# EAGLE board CE6A (EAGLE 6.5.0)
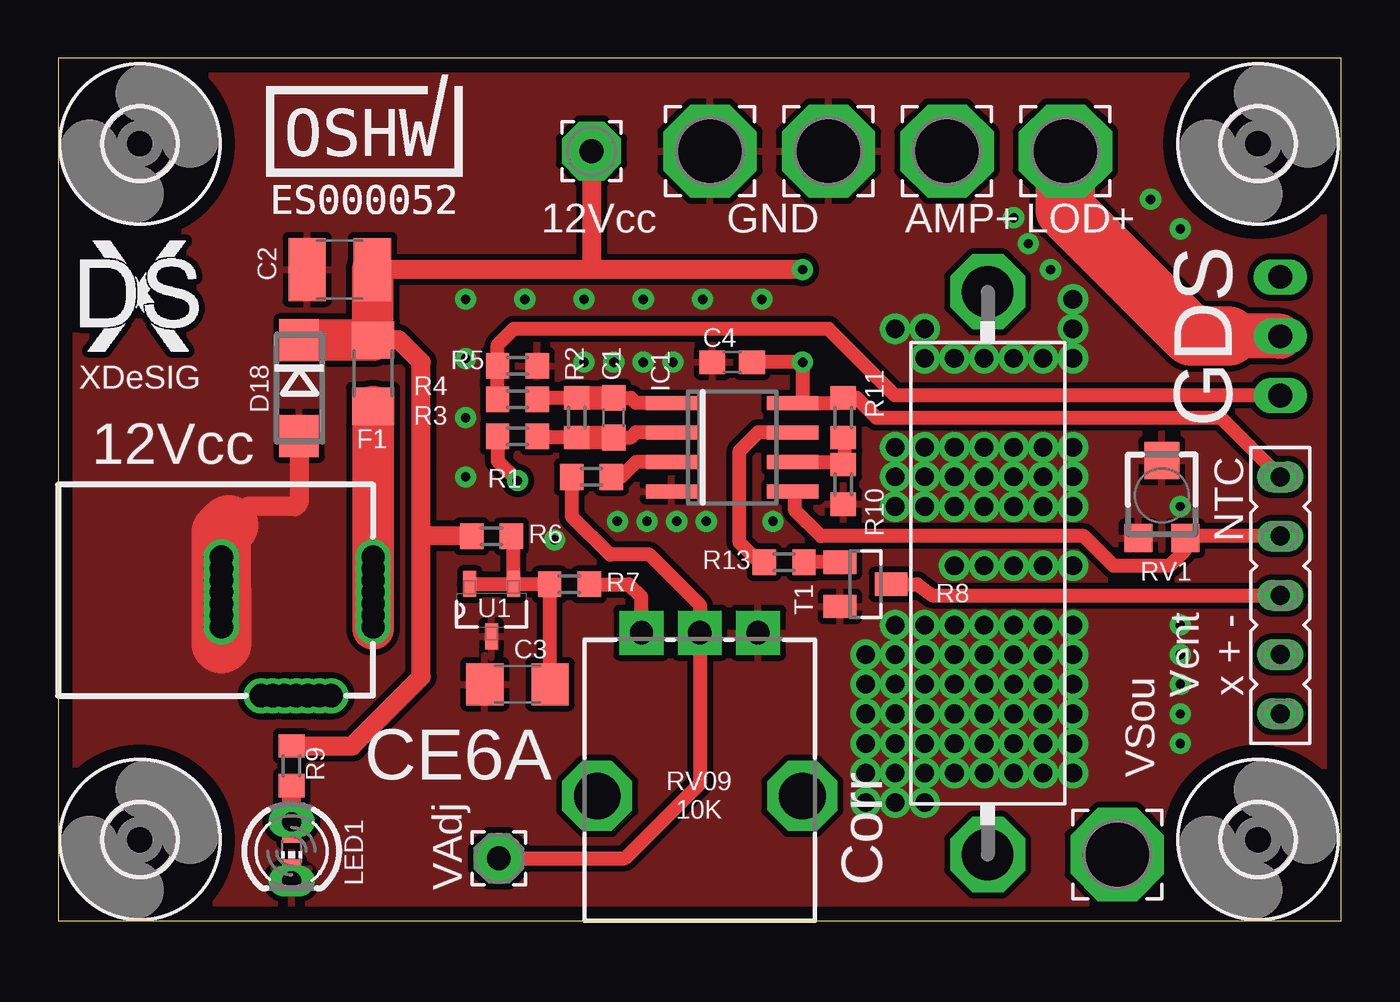
[diagram p0: board, top side]
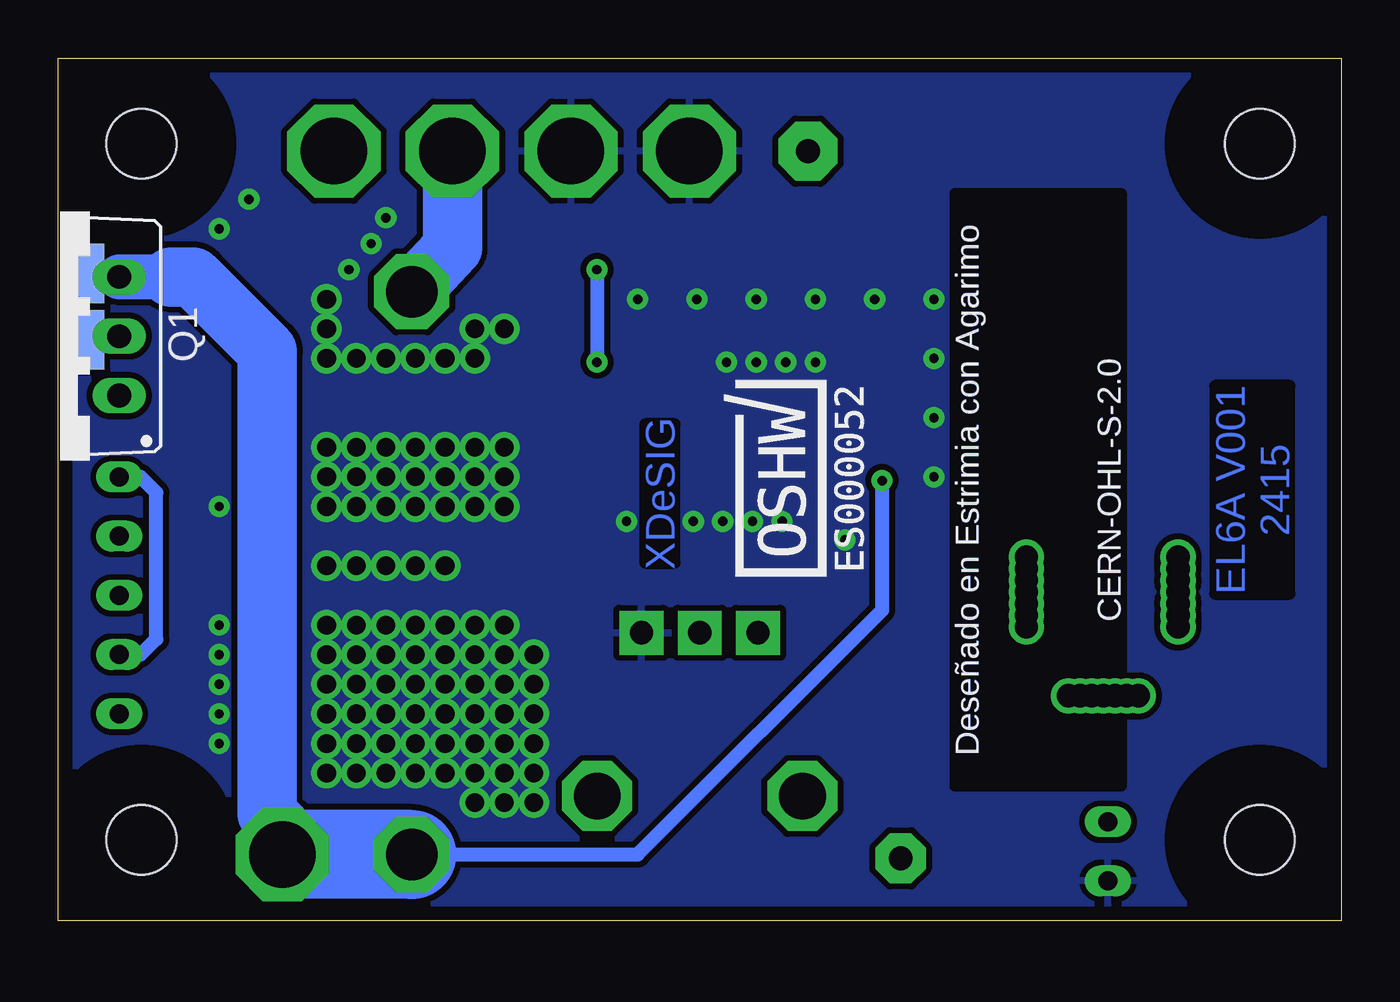
[diagram p1: board, bottom side, seen from below]

Size 55 x 36.98 mm. Coordinates in mm from the lower left corner, seen from the top.
Outline: 0,36.98 0,0 55,0 55,36.98 0,36.98
Copper layers (1*16): Top 0.035mm / dielectric 1.5mm / Bottom 0.035mm
Design rules "Vias_pintadas *": minimum track width 10mil, minimum drill 22mil, track to track 10mil, track to pad 10mil, pad to pad 8mil, via to via 12mil, smd to smd 8mil, copper to edge 24mil, drill to drill 12mil, minimum pad ring 10mil, minimum via ring 10mil, stop-mask expansion 2mil, vias tented up to drill 60mil, thermal gap 10mil
Net classes: 0 default: width 0.254 mm, drill 0.61 mm, clearance 0.254 mm

## Footprints (pad centres in the part's own frame; a part is rotated, then mirrored left to right if it is on the bottom)
C0603 = smd 1.1 x 1: 1 -0.85,0; 2 0.85,0
C1210 = smd 1.6 x 2.7: 1 -1.4,0; 2 1.4,0
C1206 = smd 1.6 x 1.8: 1 -1.4,0; 2 1.4,0
DO214AC = smd 1.8 x 1.7: A 2.05,0; C -2.05,0
R1206 = smd 1.6 x 1.803: 1 -1.422,0; 2 1.422,0
3,0 = hole 3: 0,0
SO08 = smd 0.6 x 2.2: 1 -1.905,-2.6; 2 -0.635,-2.6; 3 0.635,-2.6; 4 1.905,-2.6; 5 1.905,2.6; 6 0.635,2.6; 7 -0.635,2.6; 8 -1.905,2.6
CHIP-LED0603 = smd 0.8 x 0.8: A 0,-0.75; C 0,0.75
LED3MM = drill 0.813 pad 1.016 long: A -1.27,0; K 1.27,0
3,81/1,1 = drill 2.85 pad 4 octagon: 1 0,0
2,54/1,0 = drill 1.016 pad 2.54 octagon: 1 0,0
2,15/1,0 = drill 1.016 pad 2.159 octagon: 1 0,0
SMD1,27-2,54 = smd 1.27 x 2.54: 1 0,0
PWR_JACK_UNI_MILLING = drill 1: + 0,4.75; +1 0,5.25; +2 0,5.75; +3 0,6.25; +4 0,4.25; +5 0,3.75; +6 0,3.25; - -6.5,4.75; -1 -6.5,5.25; -2 -6.5,5.75; -3 -6.5,4.25; -4 -6.5,3.75; -5 -6.5,6.25; -6 -6.5,3.25; -- -3.3,0.3; --1 -3.8,0.3; --2 -4.3,0.3; --3 -4.8,0.3; --4 -2.8,0.3; --5 -2.3,0.3; --6 -1.8,0.3
TO220BV = drill 1.016 long: D 0,-2.54; G -2.54,-2.54; S 2.54,-2.54
R0603 = smd 1 x 1.1: 1 -0.85,0; 2 0.85,0
VTA54 = drill 2.2 octagon: 1 -12.065,0; 2 12.065,0
TC33X = smd 1.2 x 1.2: 1 -1,-1.825; 3 1,-1.825 | smd 1.5 x 1.6: 2 0,1.5
RV09 = drill 1 pad 1.88 square: P$1 7,-2.5; P$2 7,0; P$3 7,2.5 | drill 2 octagon: P$4 0,-4.4; P$5 0,4.4
FE05-1 = drill 0.813 long: 1 -5.08,0; 2 -2.54,0; 3 0,0; 4 2.54,0; 5 5.08,0
SOT23 = smd 1 x 1.4: 1 -0.95,-1.1; 2 0.95,-1.1; 3 0,1.1
SOT95P240X135-3N = smd 1.118 x 0.559: 1 -1.118,0; 2 1.118,-0.94; 3 1.118,0.94

## Placement (x,y rotation side)
C1  10nF  [C0603]  23.81,21.57 90 top
C2  10uF/25V  [C1210]  12.07,27.92 180 top
C3  10uF/16V  [C1206]  19.68,10.14 180 top
C4  100nF  [C0603]  28.89,23.95 0 top
D18  ss14  [DO214AC]  10.32,22.84 270 top
F1  [R1206]  13.49,23.48 90 top
H1  MOUNT-HOLE3.0  [3,0]  3.49,33.32 0 top
H2  MOUNT-HOLE3.0  [3,0]  51.44,33.32 0 top
H3  MOUNT-HOLE3.0  [3,0]  3.49,3.47 0 top
H4  MOUNT-HOLE3.0  [3,0]  51.44,3.47 0 top
IC1  LM358  [SO08]  28.89,20.3 270 top
LED1  0603  [CHIP-LED0603]  10,2.98 180 top
LED1.1  3mm  [LED3MM]  10,2.98 270 top
PAD1  +Load  [3,81/1,1]  43.18,33 0 top
PAD2  +12V  [2,54/1,0]  22.86,33 0 top
PAD3  +AMP  [3,81/1,1]  38.1,33 0 top
PAD4  GND  [3,81/1,1]  33.02,33 270 top
PAD5  VSoU  [3,81/1,1]  45.4,2.84 270 top
PAD6  GND  [3,81/1,1]  27.94,33 0 top
PAD7  V_adj  [2,15/1,0]  18.89,2.68 270 top
PAD8  [SMD1,27-2,54]  53.66,27.76 0 bottom
PAD9  [SMD1,27-2,54]  53.66,24.9 180 bottom
PWR  DC-12V  [PWR_JACK_UNI_MILLING]  13.49,9.35 0 top
Q1  40N03  [TO220BV]  54.93,25.06 90 bottom
R1  1K  [R0603]  22.86,19.03 0 top
R2  220K  [R0603]  22.23,21.57 90 top
R3  1K  [R0603]  19.68,20.78 180 top
R4  1K  [R0603]  19.68,22.36 180 top
R5  4K7  [R0603]  19.68,23.79 180 top
R6  2K  [R0603]  18.57,16.49 180 top
R7  22K  [R0603]  21.91,14.43 180 top
R8  0.1R  [VTA54]  39.85,14.9 270 top
R9  4K7  [R0603]  10,6.65 90 top
R10  33K  [R0603]  33.66,18.71 90 top
R11  33K  [R0603]  33.66,21.57 90 top
R13  4K7  [R0603]  31.11,15.38 180 top
RV1  EVM3ES 50K  [TC33X]  47.31,18.24 0 top
RV2  RV09/10K  [RV09]  27.5,5.35 90 top
SV1  [FE05-1]  52.39,13.95 270 top
T1  BC847  [SOT23]  34.61,14.43 270 top
U1  TL431ASA-7  [SOT95P240X135-3N]  18.57,13.32 90 top
U$1  XDESIG5MM  [XDESIG_CU]  0.95,24.43 0 top
U$2  [XDESIG]  0.95,24.43 0 top
U$3  [OSHW_ES000052]  8.89,30.3 0 top
U$4  [OSHW_ES000052]  20.48,14.74 90 bottom

## Library data of the parts
C1-C4 R1-R11 R13 = rcl
D18 = diode
F1 LED1 RV1 = adafruit
H1-H4 = holes
IC1 = linear
LED1.1 = led
PAD1-PAD9 = wirepad
PWR = gogo
Q1 = transistor-power
RV2 = SparkFun-Electromechanical; PROD_ID: RES-09177
SV1 = con-lsta; OC_FARNELL: unknown; OC_NEWARK: unknown
T1 = nxp_60
U1 = TL431ASA-7; AVAILABILITY: In Stock; CHECK_PRICES: https://www.snapeda.com/parts/TL431ASA-7/Diodes+Inc./view-part/?ref=eda; DESCRIPTION: Shunt Voltage Reference IC Adjustable 2.495V 36 VV ±1% 100 mA SOT-23-3; MF: Diodes Inc.; MP: TL431ASA-7; PACKAGE: SOT-23-3 Diodes Inc.; PRICE: None; PURCHASE-URL: https://www.snapeda.com/api/url_track_click_mouser/?unipart_id=282159&manufacturer=Diodes Inc.&part_name=TL431ASA-7&search_term=tl431; SNAPEDA_LINK: https://www.snapeda.com/parts/TL431ASA-7/Diodes+Inc./view-part/?ref=snap
U$1-U$4 = xdesig

## Nets
+12V: C2.1 C4.2 D18.C F1.2 IC1.8 PAD2.1 R6.2 R9.2 R11.2 SV1.1 SV1.4
+LOAD: PAD1.1 PAD9.1 Q1.D
GND: C2.2 C3.2 C4.1 D18.A IC1.4 LED1.1.K LED1.C PAD4.1 PAD6.1 PWR.- R5.1 R10.1 RV1.1 RV1.2 RV2.P$1 T1.2 U1.1
N$1: C3.1 R6.1 R7.2 U1.2 U1.3
N$2: IC1.3 R1.2
N$3: C1.1 IC1.2 R2.1 R3.1
N$4: C1.2 IC1.1 R2.2 R4.1
N$5: Q1.G R4.2 R5.2
N$8: PAD3.1 R8.1
N$10: R7.1 RV2.P$3
N$11: LED1.1.A LED1.A R9.1
N$13: IC1.6 R10.2 R11.1
N$16: IC1.7 R13.2
N$17: R13.1 T1.1
N$21: F1.1 PWR.+
NTC100K: IC1.5 RV1.3 SV1.2
V_ADJ: PAD7.1 R1.1 RV2.P$2
VENTILA-: SV1.3 T1.3
VSOU: PAD5.1 PAD8.1 Q1.S R3.2 R8.2

## Tracks (layer width: path | path; a pad name or v marks a point on that pad's centre or on a via)
+12V  (via drill 0.4)
  Top 0.61: IC1.8 32.07,22.21 | 32.07,22.21 33.44,22.21 R11.2 34.23,22.42 35.08,21.57 49.85,21.57 SV1.1 | C4.2 v31.91,23.95 31.91,22.36 32.07,22.21
  Top 0.813: v31.91,27.92 22.86,27.92 | 22.86,27.92 C2.1 | PAD2.1 22.86,27.92 | R9.2 12.6,7.5 15.56,10.46 15.56,16.49 | 15.56,16.49 15.56,23.95 14.61,24.9 F1.2 | R6.2 15.56,16.49
  Top 1.778: D18.C F1.2 13.47,24.92 C2.1
  Bottom 0.61: v31.91,27.92 v31.91,23.95 | SV1.4 51.47,11.41 50.8,12.08 50.8,18.36 51.47,19.03 SV1.1
+LOAD
  Top 1.93: Q1.D 50.16,25.06
  Top 2.54: PAD1.1 43.18,30.46 48.58,25.06 50.16,25.06
  Bottom 0.61: Q1.D 53.5,25.06 PAD9.1
GND  (via drill 0.4, 0.8)
  Top 0.813: D18.A 10.32,17.92 10.16,17.76 8.1,17.76 7.3,16.97
  Top 2.54: PWR.- 6.99,11.89 6.99,16.65 7.3,16.97
  other vias: 39.69,8.87 39.69,10.14 39.69,11.41 39.69,12.68 39.69,17.76 39.69,19.03 39.69,20.3 40.96,20.3 40.96,19.03 42.23,20.3 30.64,17.12 39.69,7.6 40.96,17.76 40.96,12.68 40.96,11.41 40.96,10.14 40.96,8.87 40.96,7.6 42.23,19.03 42.23,17.76 42.23,12.68 42.23,11.41 42.23,10.14 42.23,8.87 43.5,20.3 43.5,19.03 43.5,17.76 43.5,12.68 43.5,11.41 43.5,10.14 43.5,8.87 38.42,7.6 38.42,8.87 38.42,10.14 38.42,11.41 38.42,12.68 38.42,17.76 38.42,19.03 38.42,20.3 43.5,7.6 42.23,7.6 38.42,6.33 39.69,6.33 40.96,6.33 42.23,6.33 43.5,6.33 38.42,24.11 39.69,24.11 40.96,24.11 42.23,24.11 43.5,24.11 23.97,17.12 25.08,23.95 48.1,10.14 48.1,8.87 48.1,7.6 48.1,29.67 43.5,25.38 37.15,25.38 37.15,20.3 37.15,19.03 37.15,17.76 35.88,11.41 37.15,11.41 37.15,10.14 37.15,8.87 37.15,7.6 37.15,6.33 37.15,5.06 35.88,10.14 35.88,8.87 35.88,7.6 35.88,6.33 35.88,5.06 39.69,15.22 40.96,15.22 38.42,15.22 42.23,15.22 43.5,15.22 37.15,12.68 35.88,12.68 35.88,19.03 35.88,17.76 37.15,24.11 35.88,25.38 48.1,11.41 48.1,12.68 48.1,17.76 34.61,5.06 34.61,6.33 34.61,7.6 34.61,8.87 34.61,10.14 34.61,11.41 22.54,23.95 21.27,16.33 22.54,26.65 25.08,26.65 27.62,26.65 30.16,26.65 20,26.65 17.46,26.65 17.46,24.11 17.46,21.57 17.46,19.03 26.51,17.12 27.78,17.12 25.24,17.12 23.81,23.95 26.35,23.95 46.83,30.94 43.5,26.65 42.55,27.92 41.59,29.03 40.96,30.14 35.88,20.3
  pour Top: 0,38.08 55.88,38.08 55.88,-0.02 0,-0.02
  pour Bottom: 0,38.08 55.88,38.08 55.88,-0.02 0,-0.02
N$1
  Top 0.61: U1.3 U1.2 | C3.1 21.09,14.4 R7.2 U1.2 | U1.2 19.51,16.4 R6.1
N$2
  Top 0.61: IC1.3 24.77,19.66 24.13,19.03 R1.2
N$3
  Top 0.61: IC1.2 24.77,20.93 24.55,20.72 C1.1 | R2.1 20.64,20.72
  Top 0.813: 20.64,20.72 R3.1
  Top 1.016: C1.1 R2.1
N$4
  Top 0.61: IC1.1 24.77,22.21 24.55,22.42 C1.2 | R2.2 20.64,22.42
  Top 0.813: 20.64,22.42 R4.1
  Top 1.016: C1.2 R2.2
N$5
  Top 0.61: Q1.G 35.88,22.52 33.02,25.38 19.53,25.38 18.84,24.69 R5.2 R4.2
N$8
  Bottom 2.54: R8.1 38.1,28.87 PAD3.1
N$10
  Top 0.61: 25,13.45 RV2.P$3 25,13.87 24.45,14.43 R7.1
N$11
  Top 0.61: LED1.1.A LED1.A
  Top 0.813: LED1.1.A R9.1
N$13
  Top 0.61: IC1.6 33.34,19.66 33.44,19.56 R10.2 33.7,19.61 33.7,20.67 R11.1
N$16
  Top 0.61: IC1.7 30,20.93 29.21,20.14 29.21,16.21 29.88,15.54 30.16,15.54 R13.2
N$17
  Top 0.61: T1.1 R13.1
N$21
  Top 1.778: F1.1 PWR.+ 13.49,12.52
NTC100K
  Top 0.61: SV1.2 48.86,16.49 RV1.3 48.31,15.9 47.62,15.22 45.24,15.22 43.97,16.49 32.7,16.49 31.59,17.6 31.59,18.3 IC1.5 32.07,18.39
V_ADJ
  Top 0.61: R1.1 22.01,17.34 23.65,15.7 25.34,15.7 27.5,13.54 RV2.P$2 27.5,5.89 24.29,2.68 PAD7.1
VENTILA-
  Top 0.61: T1.3 36.83,14.43 37.47,13.95 SV1.3
VSOU  (via drill 0.4)
  Top 0.61: R3.2 18.84,19.72 v19.68,18.87
  Bottom 0.61: R8.2 30.16,2.84 19.68,13.32 v19.68,18.87 | Q1.S 53.5,27.6 PAD8.1
  Bottom 1.93: 50.16,27.6 Q1.S
  Bottom 2.54: 50.16,27.6 49.21,27.6 46.04,24.43 46.04,4.58 45.4,3.95 PAD5.1
  Bottom 3.81: R8.2 PAD5.1

## Text on the board
Bottom: EL6A V001 / 2415 | Deseñado en Estrimia con Agarimo / / / / CERN-OHL-S-2.0 | XDeSIG
tPlace: 12Vcc | GND | AMP+ | LOD+ | GDS | XDeSIG | 12Vcc | NTC | Vent / x + - | VSou | CE6A | VAdj | RV09 / 10K | Corr
bPlace: Deseñado en Estrimia con Agarimo / / / / CERN-OHL-S-2.0